# Altium PCB Vesta_cape.PcbDoc (part 1 of 2)
Units mm, origin at the board's own origin, x right, y up, seen from the top; angles counter-clockwise.
Board outline 180 x 109.5 mm, 4 copper layers (Component Side, Ground Plane, Power Plane, Solder Side), stack 1.602 mm thick; 135 components, 158 nets, 582 pads, 796 vias.
Unrouted connection lines stored in the file: 10.
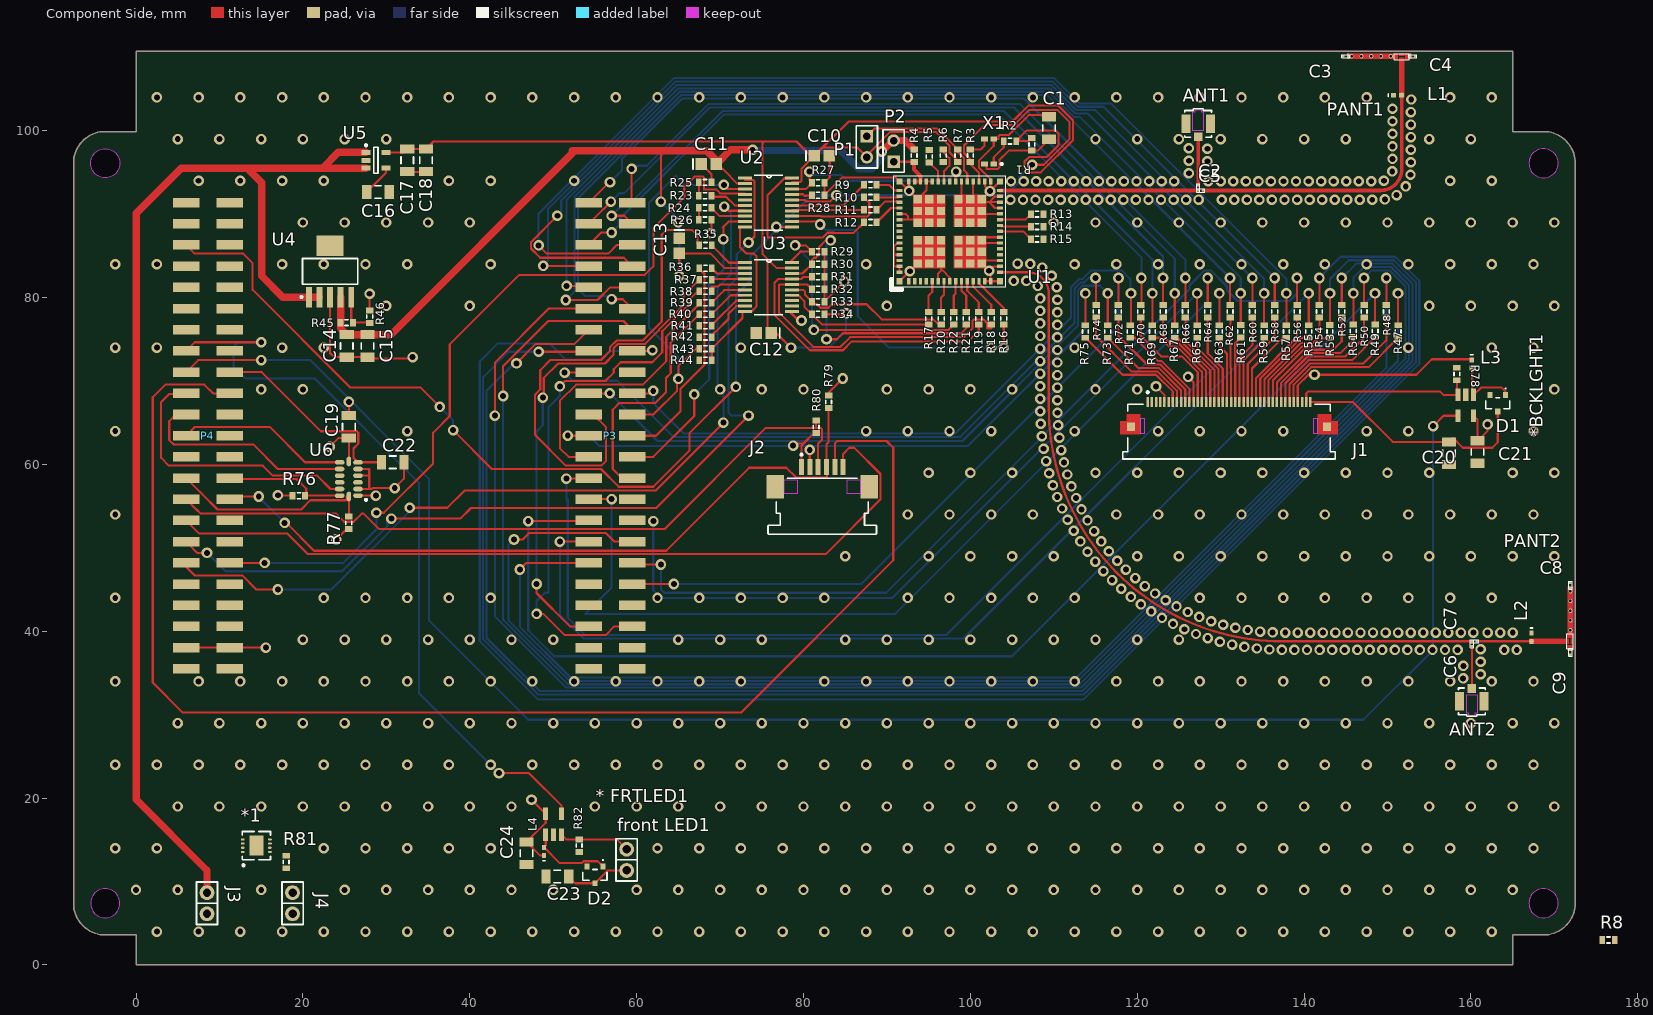
[diagram p0: Component Side view]
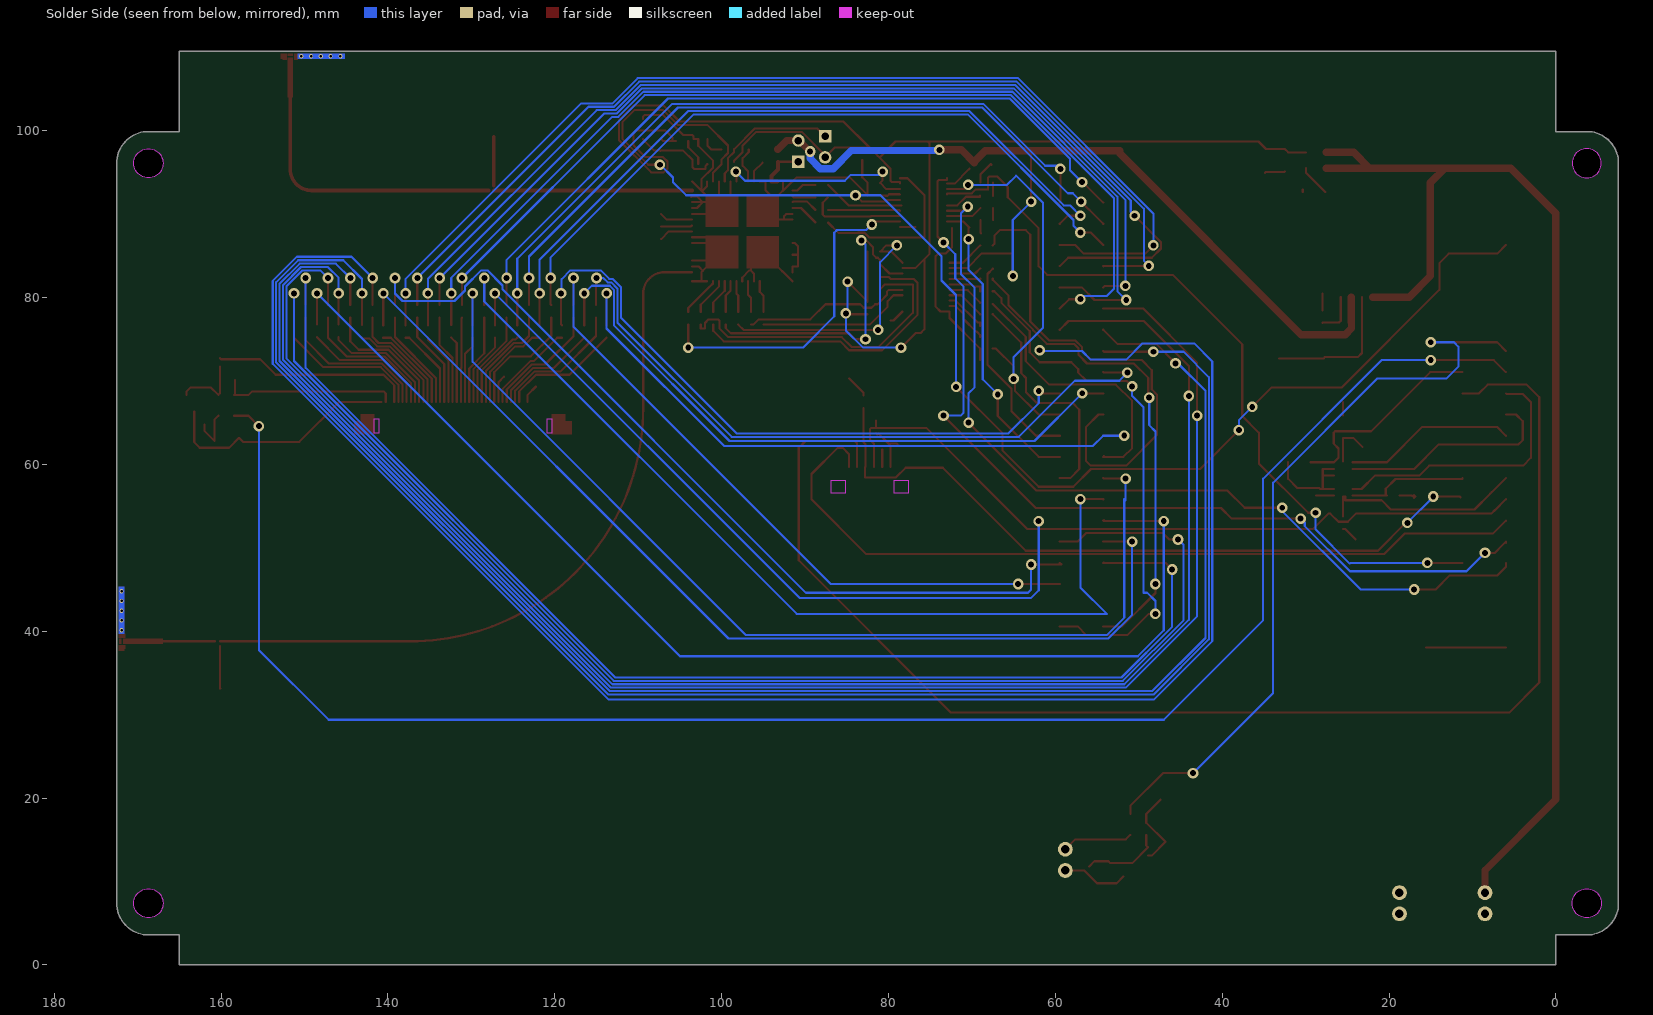
[diagram p1: Solder Side view, seen from below]
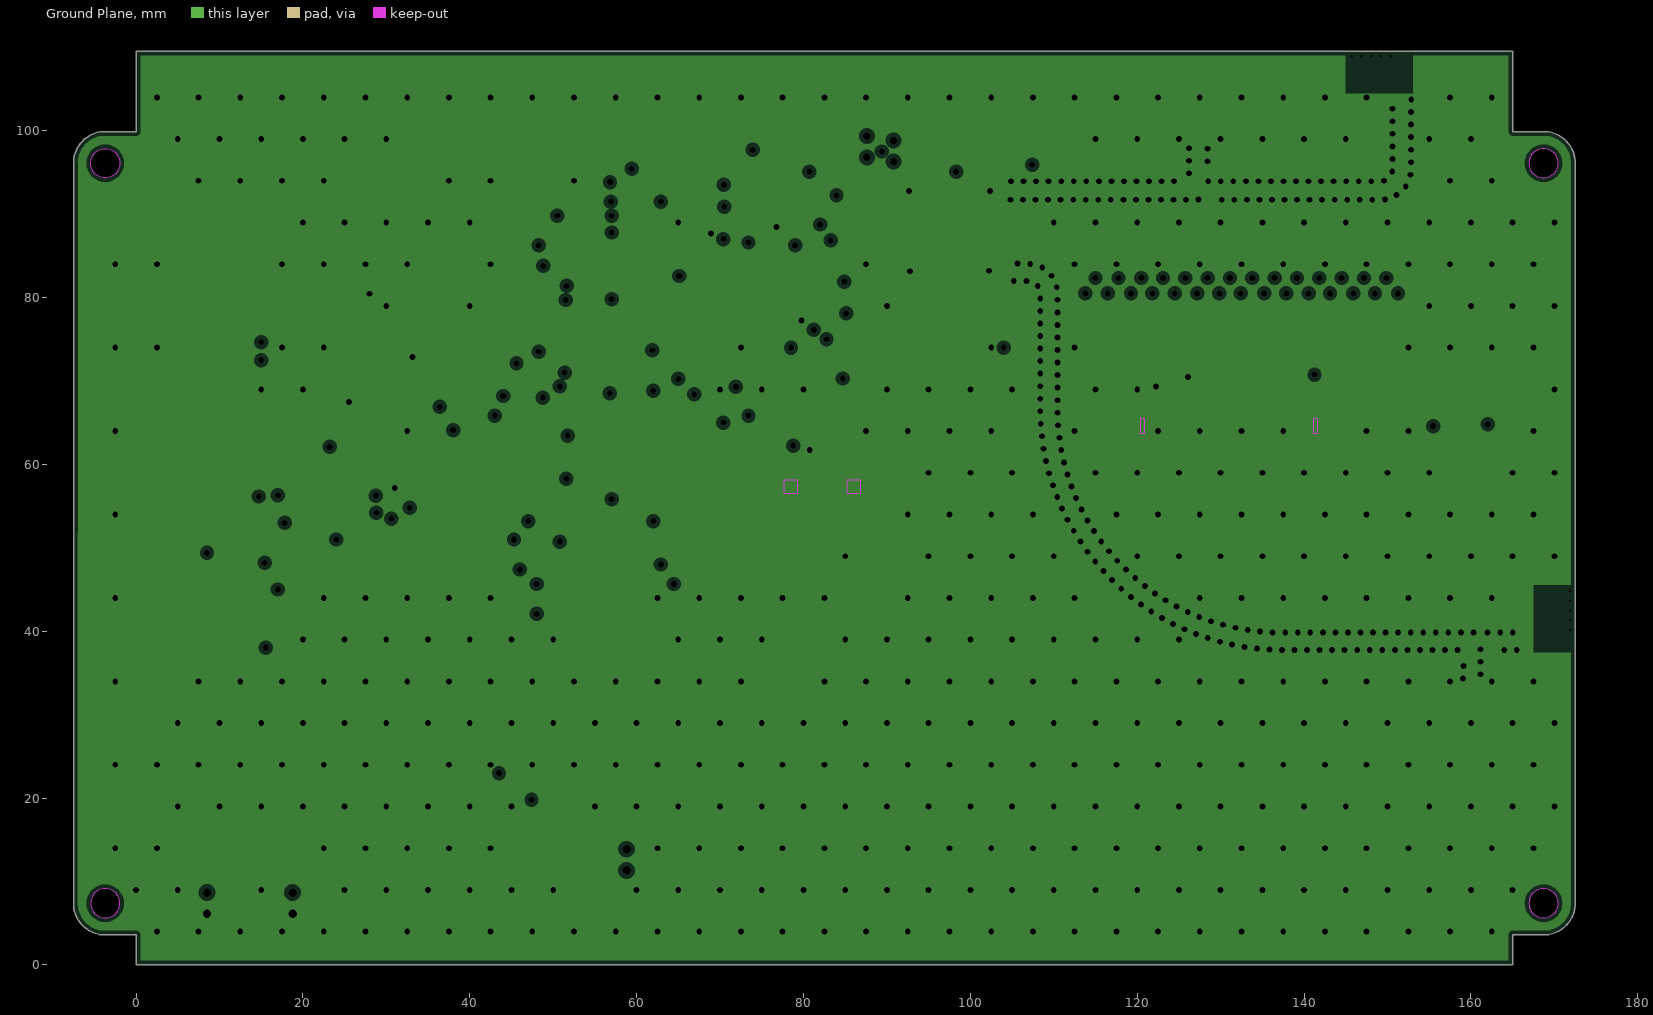
[diagram p2: Ground Plane, clearances drawn from the general rule]
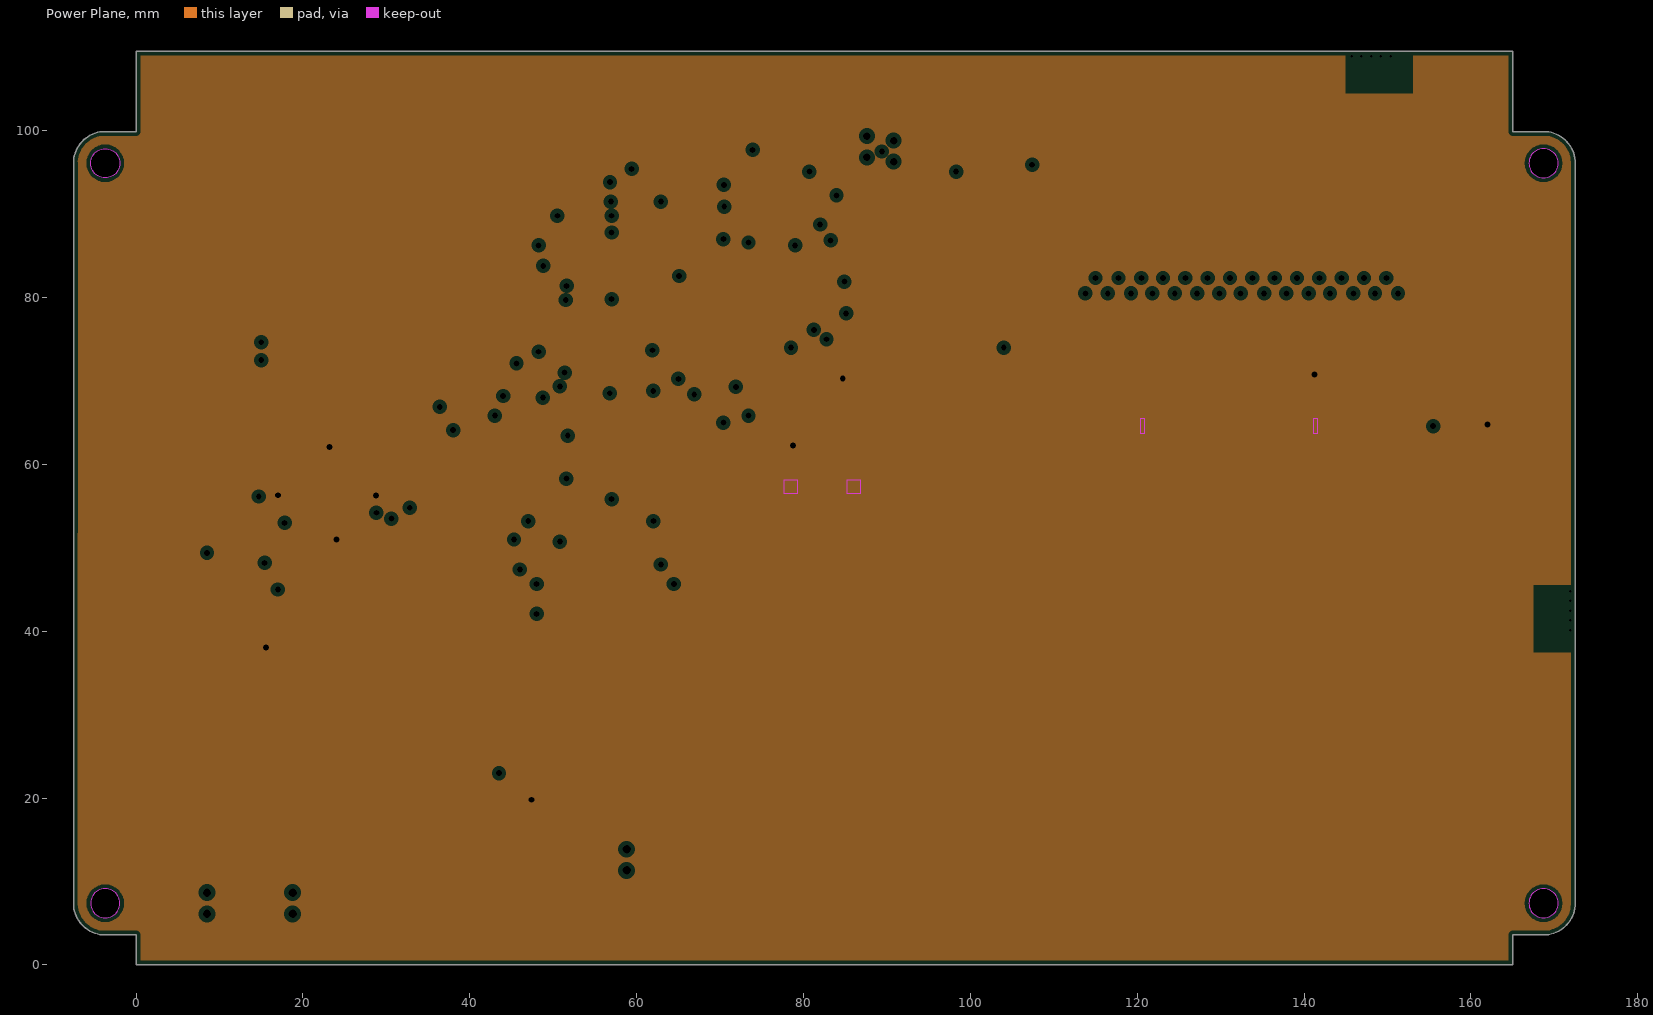
[diagram p3: Power Plane, clearances drawn from the general rule]

## Layer stack, top to bottom
Top Solder: solder mask 0.0102, Solder Resist, Dk 3.5
Component Side: signal copper 0.03
Dielectric 1: core 0.2, FR-4, Dk 4.58
Ground Plane: plane copper 0.018
Dielectric 3: prepreg 1.1, FR-4, Dk 4.58
Power Plane: plane copper 0.018
Dielectric 4: core 0.2, FR-4, Dk 4.58
Solder Side: signal copper 0.0356
Bottom Solder: solder mask 0.0102, Solder Resist, Dk 3.5

## Board outline
-4.314,3.65 0,3.65 0,0 165,0 165,3.65 169.315,3.65 ccw(c168.7,7.4) 172.5,7.4 172.5,96.092 ccw(c168.7,96.1) 169.314,99.85 165,99.85 165,109.5 0,109.5 0,99.85 -4.314,99.85 ccw(c-3.7,96.1) -7.5,96.1 -7.5,7.4 ccw(c-3.7,7.4)
cut-out: 166.95,96.1 ccw(c168.7,96.1) 168.7,94.35 ccw(c168.7,96.1) 170.45,96.1 ccw(c168.7,96.1) 168.7,97.85 ccw(c168.7,96.1)
cut-out: 166.95,7.4 ccw(c168.7,7.4) 168.7,5.65 ccw(c168.7,7.4) 170.45,7.4 ccw(c168.7,7.4) 168.7,9.15 ccw(c168.7,7.4)
cut-out: -5.45,7.4 ccw(c-3.7,7.4) -3.7,5.65 ccw(c-3.7,7.4) -1.95,7.4 ccw(c-3.7,7.4) -3.7,9.15 ccw(c-3.7,7.4)
cut-out: -3.7,94.35 cw(c-3.7,96.1) -5.45,96.1 cw(c-3.7,96.1) -3.7,97.85 cw(c-3.7,96.1) -1.95,96.1 cw(c-3.7,96.1)

## Design rules (kind name [scope] priority, off if disabled: settings)
AssemblyTestPointUsage SilkToBoardRegionClearance [All] p2:
Clearance Clearance_2 [InNamedPolygon('Component Side-No Net')] p1: gap=0.254
Clearance [InNet('NetC5_1')] p2: gap=0.152
Clearance "Clearance for polygon" [(HasFootprint('ANT_BRD_CUT') OR InNet('NetC21_1'))] p3: gap=0
Clearance Clearance_1 [All] p4: gap=0.152
ComponentClearance [InComponent('PANT2') Or InComponent('PANT1')] p1: gap=0 collisioncheckmode=3 verticalgap=0 showdistances=FALSE
ComponentClearance ComponentClearance_1 [InComponent('C5') Or InComponent('C24') Or InComponent('C23') Or InComponent('C17')] p2: gap=0 collisioncheckmode=3 verticalgap=0 showdistances=FALSE
ComponentClearance ComponentClearance_2 [All] p3: gap=0.254 collisioncheckmode=3 verticalgap=0.254 showdistances=FALSE
MatchedLengths [InNetClass(SDIO_wl1835_pads_to_r)] p1: tolerance=5 checknetsindiffpair=TRUE checkdiffpairvsdiffpair=TRUE checkothers=TRUE
MatchedLengths DiffPair_DIFF100MatchedLengths [InDifferentialPairClass('DIFF100')] p2: tolerance=0.152 checknetsindiffpair=TRUE checkdiffpairvsdiffpair=FALSE checkothers=FALSE
MinimumSolderMaskSliver SilkscreenOverComponentPads_1 [All] p2: minsoldermaskwidth=0.254
MinimumSolderMaskSliver SilkToSolderMaskClearance [IsPad] p3: minsoldermaskwidth=0.254
MinimumSolderMaskSliver SilkscreenOverComponentPads [All] p4: minsoldermaskwidth=0.254
PlaneClearance [All] p1: clearance=0.508
PlaneConnect [All] p1: planeconnectstyle=Relief reliefexpansion=0.508 reliefentries=4 reliefconductorwidth=0.254 reliefairgap=0.254
PolygonConnect PolygonConnect_2 [All - IsVia vs IsNamedPolygon('Component Side-No Net')] p1: connectstyle=Relief reliefconductorwidth=0.3 reliefentries=4 polygonreliefangle="90 Angle" airgapwidth=0.3
PolygonConnect "PAD connections rule" [All vs IsNamedPolygon('Component Side-GND')] p2: connectstyle=Relief reliefconductorwidth=0.254 reliefentries=4 polygonreliefangle="90 Angle" airgapwidth=0.254
PolygonConnect PolygonConnect_1 [All vs IsNamedPolygon('Component Side-GND')] p3: connectstyle=Relief reliefconductorwidth=0.254 reliefentries=4 polygonreliefangle="90 Angle" airgapwidth=0.254
PolygonConnect [All] p4: connectstyle=Direct reliefconductorwidth=0.254 reliefentries=4 polygonreliefangle="90 Angle" airgapwidth=0.254
RoutingVias [All] p1: holewidth=0.305 width=0.635 viastyle="Through Hole" minholewidth=0.3 minwidth=0.453 maxholewidth=0.711 maxwidth=1.27
ShortCircuit ShortCircuit_molex [J1 vs J1] p1: allowed=TRUE
SilkToBoardRegionClearance SilkToBoardRegionClearance_1 [All] p1:
SilkToSolderMaskClearance SilkToSolderMaskClearance_1 [IsPad] p1: minsilkscreentomaskgap=0.254 clearancetoexposedcopper=TRUE
SolderMaskExpansion SolderMaskExpansion_via_tenting [IsVia] p1: expansion=-2
SolderMaskExpansion [All] p2: expansion=0.102
Width Width_VDD_Bat [InNet('VDD_BAT (3.7-4.2V)')] p1: maxlimit=0.889 minlimit=0.889 preferedwidth=0.889
Width [InNet('NetC5_1') Or InNet('NetC24_1') Or InNet('NetC17_1') Or InNet('NetANT2_1') Or InNet('NetC23_1') Or InNet('ANTENNA1 NET')] p2: maxlimit=0.27 minlimit=0.263 preferedwidth=0.27 toplayer_minwidth=0.27 bottomlayer_maxwidth=0.263 bottomlayer_prefwidth=0.263 impedancedriven=TRUE minimp=50.000000 maximp=50.000000 favimp=50.000000
Width Width_1 [All] p3: maxlimit=5 minlimit=0.254 preferedwidth=0.254
24 further rules are at their usual default settings.

## Classes and differential pairs
net class LCD_DATA[0..23]: LCD_DATA0 LCD_DATA1 LCD_DATA2 LCD_DATA3 LCD_DATA4 LCD_DATA5 LCD_DATA6 LCD_DATA7 LCD_DATA8 LCD_DATA9 LCD_DATA10 LCD_DATA11 LCD_DATA12 LCD_DATA13 LCD_DATA14 LCD_DATA15 LCD_DATA16 LCD_DATA17 LCD_DATA18 LCD_DATA19 LCD_DATA20 LCD_DATA21 LCD_DATA22 LCD_DATA23
component class Vesta_wifi_power_3v3_1v8: C14 C15 C16 C17 C20 R11 R46 U4 U5
component class vesta_IO_buffering: C10 C11 C13 C14 R3 R6 R23 R25 R29 R30 R32 R33 R35 R36 R37 R39 R40 R42 R43 R44 R70 R72 R73 R74 R76 R80 U2 U3
component class Vesta_cape: *1 "* FRTLED1" *BCKLGHT1 C3 C5 C7 C9 C10 C20 D1 D2 "front LED1" HDR_1 HDR_2 J1 J2 J3 J4 L2 L3 P3 P4 R14 R15 R18 R21 R22 R23 R25 R26 R28 R29 R30 R32 R33 R35 R36 R37 R39 R40 R42 R43 R44 R47 R50 R51 R53 R54 R58 R61 R65 R68 R72 R75 R79 R80 R81 R82 U6
component class Vesta_cape_wifi: ANT1 ANT2 C3 C5 C6 C9 C10 C19 C20 C21 C24 L2 L3 P1 P2 PANT1 PANT2 R2 R3 R6 R9 R10 R11 R13 R14 R15 R16 R17 R18 R21 R32 R47 R50 R51 R53 R54 R58 R65 R68 U1 X1

## Components (designator, comment, footprint, x,y, rotation, side; value= is the part's Value field where it differs from the comment)
*1 "CN3065" CN3065-LIPO 14.418,14.3 r90 top
"* FRTLED1" "FAN5333B-front-LED" FAN5333A 49.1,15.6 r90 top
*BCKLGHT1 "FAN5333B-LCD-backlight" FAN5333A 160.325,68.329 r270 top
ANT1 "U.FL-R-SMT" U.FL-R-SMT 127.304,100.809 r0 top
ANT2 "U.FL-R-SMT" U.FL-R-SMT 160.1,31.6 r180 top
C1 "100nF" C1206 109.433,100.318 r270 top
C2 "10pF" CAPACITOR_0603 127.305,93.131 r90 top
C3 "2.2pF" CAPACITOR_0603 144.993,108.924 r180 top
C4 "2.2pF" CAPACITOR_0603 153.013,108.924 r0 top
C5 "10pF" CAPACITOR_0603 127.605,92.831 r180 top
C6 "10pF" CAPACITOR_0603 160.122,38.5 r270 top
C7 "10pF" CAPACITOR_0603 160.422,38.8 r180 top
C8 "2.2pF" CAPACITOR_0603 171.928,45.51 r90 top
C9 "2.2pF" CAPACITOR_0603 171.928,37.49 r270 top
C10 "Cap Semi" C2512 82.2,97 r0 top
C11 "Cap Semi" C2512 68.65,96 r0 top
C12 "100nF" C2512 75.25,75.75 r180 top
C13 "100nF" C2512 65.1,86.2 r270 top
C14 "10uF" C1206 25.25,74.2 r90 top
C15 "10uF" C1206 27.75,74.2 r90 top
C16 "Cap Semi" C1206 29,92.65 r180 top
C17 "Cap Semi" C1206 32.5,96.45 r90 top
C18 "Cap Semi" C1206 34.75,96.45 r90 top
C19 "0.1uF" C1206 25.5,64.5 r270 top
C20 "1uF" C1206 157.37,61.346 r90 top
C21 "10uF" C1206 160.798,61.478 r90 top
C22 "1uF" C1206 30.75,60.25 r180 top
C23 "1uF" C1206 50.5,10.6 r0 top
C24 "10uF" C1206 46.8,13.4 r90 top
D1 "BAT54" NXP-SOT23-3_V 163.21,67.334 r0 top
D2 "BAT54" NXP-SOT23-3_V 55,10.8 r0 top
"front LED1" "ValueValueAux" JMP1X2-F180_2.54 58.8,12.6 r90 top
J1 "54104-4031" MOLX-54104-4031 131,66 r0 top locked
J2 "52271-0679" MOLX-52271-0679 82.25,58.5 r0 top locked
J3 "ValueValueAux" JMP1X2-F180_2.54 8.5,7.4 r270 top
J4 "ValueValueAux" JMP1X2-F180_2.54 18.75,7.4 r90 top
L1 "1.5nH" 0402-A 151.203,104.249 r0 top
L2 "1.5nH" 0402-A 167.253,39.3 r270 top
L3 "10uH" 0402-A 160.103,72.038 r270 top
L4 "10uH" 0402-A 48.9,13.6 r90 top
P1 "Header 2" HDR1X2 87.6,99.34 r270 top
P2 "Header 2" HDR1X2 90.804,96.281 r90 top
P3 "P8" HEADER_23_2_SMD 54.26,35.5 r90 top locked
P4 "P9" HEADER_23_2_SMD 6,35.5 r90 top locked
PANT1 "ANTENNA" ANT_BRD_CUT 151.703,108.849 r0 top locked
PANT2 "ANTENNA" ANT_BRD_CUT 171.853,38.8 r270 top locked
R1 "0" J1-0603 107.368,98.364 r90 top
R2 "1K0" J1-0603 104.75,98.75 r0 top
R3 "0" J1-0603 100,97 r270 top
R4 "0" J1-0603 93.25,97 r270 top
R5 "0" J1-0603 95.079,96.925 r270 top
R6 "0" J1-0603 96.75,97 r90 top
R7 "0" J1-0603 98.5,97 r90 top
R8 "0" J1-0603 176.494,2.994 r0 top
R9 "0" J1-0603 88,93.5 r0 top
R10 "0" J1-0603 88,92 r0 top
R11 "0" J1-0603 88,90.5 r0 top
R12 "0" J1-0603 88,89 r0 top
R13 "0" J1-0603 108,90 r180 top
R14 "0" J1-0603 108,88.5 r180 top
R15 "0" J1-0603 108,87 r180 top
R16 "0" J1-0603 104,77.5 r270 top
R17 "0" J1-0603 95,77.5 r90 top
R18 "0" J1-0603 102.5,77.5 r270 top
R19 "0" J1-0603 101,77.5 r270 top
R20 "0" J1-0603 96.5,77.5 r90 top
R21 "0" J1-0603 99.5,77.5 r270 top
R22 "0" J1-0603 98,77.5 r270 top
R23 "0" J1-0603 68.2,92.2 r0 top
R24 "0" J1-0603 68.2,90.75 r0 top
R25 "1K0" J1-0603 68.2,93.8 r180 top
R26 "1K0" J1-0603 68.2,89.3 r180 top
R27 "150K" J1-0603 81.75,93.75 r180 top
R28 "150K" J1-0603 81.75,92.25 r180 top
R29 "10k" J1-0603 81.75,85.5 r0 top
R30 "10k" J1-0603 81.75,84 r0 top
R31 "10k" J1-0603 81.75,82.5 r0 top
R32 "10k" J1-0603 81.75,81 r0 top
R33 "10k" J1-0603 81.75,79.5 r0 top
R34 "10k" J1-0603 81.75,78 r0 top
R35 "0" J1-0603 68.25,86.25 r0 top
R36 "0" J1-0603 68.25,83.5 r0 top
R37 "0" J1-0603 68.25,82.125 r0 top
R38 "0" J1-0603 68.25,80.75 r0 top
R39 "0" J1-0603 68.25,79.375 r0 top
R40 "0" J1-0603 68.25,78 r0 top
R41 "0" J1-0603 68.25,76.625 r0 top
R42 "0" J1-0603 68.25,75.25 r0 top
R43 "0" J1-0603 68.25,73.875 r0 top
R44 "1K0" J1-0603 68.25,72.5 r0 top
R45 "7.15K" J1-0603 25.25,77 r180 top
R46 "4.12K" J1-0603 28,77.7 r270 top
R47 "0" J1-0603 151.257,75.934 r270 top
R48 "0" J1-0603 149.86,78.347 r270 top
R49 "0" J1-0603 148.5,76 r270 top
R50 "0" J1-0603 147.183,78.347 r270 top
R51 "0" J1-0603 145.9,76 r270 top
R52 "0" J1-0603 144.506,78.347 r270 top
R53 "0" J1-0603 143.1,75.95 r270 top
R54 "0" J1-0603 141.83,78.347 r270 top
R55 "0" J1-0603 140.553,75.934 r270 top
R56 "0" J1-0603 139.153,78.347 r270 top
R57 "0" J1-0603 137.877,75.934 r270 top
R58 "0" J1-0603 136.476,78.347 r270 top
R59 "0" J1-0603 135.201,75.934 r270 top
R60 "0" J1-0603 133.799,78.347 r270 top
R61 "0" J1-0603 132.4,75.95 r270 top
R62 "0" J1-0603 131.123,78.347 r270 top
R63 "0" J1-0603 129.848,75.934 r270 top
R64 "0" J1-0603 128.446,78.347 r270 top
R65 "0" J1-0603 127.172,75.934 r270 top
R66 "0" J1-0603 125.769,78.347 r270 top
R67 "0" J1-0603 124.496,75.934 r270 top
R68 "0" J1-0603 123.092,78.347 r270 top
R69 "0" J1-0603 121.82,75.934 r270 top
R70 "0" J1-0603 120.416,78.347 r270 top
R71 "0" J1-0603 119.144,75.934 r270 top
R72 "0" J1-0603 117.739,78.347 r270 top
R73 "0" J1-0603 116.468,75.934 r270 top
R74 "0" J1-0603 115.062,78.347 r270 top
R75 "0" J1-0603 113.792,75.934 r270 top
R76 "4.7k" J1-0603 19.5,56.25 r180 top
R77 "4.7k" J1-0603 25.5,53 r270 top
R78 "6" J1-0603 158.325,70.833 r270 top
R79 "4.7k" J1-0603 83,67.5 r90 top
R80 "4.7k" J1-0603 81.5,64.5 r270 top
R81 "2.2k" J1-0603 17.981,12.35 r270 top
R82 "100" J1-0603 53.1,14.3 r90 top
U1 "WG7835-T0B module_ref_130904" E-13.4X13.3-N100_0.75-TOP 90.829,81.281 r0 top
U2 "TXS0108E_PW_20" PW20 75.819,91.375 r0 top
U3 "TXS0108E_PW_20" PW20 75.819,81.25 r0 top
U4 "TL1963ADCQT" TI-DCQ6_M 23.25,83.125 r90 top
U5 "TPS73618DBVR" TI-DBV5_N 28.75,96.45 r0 top
U6 "ADXL345BCCZ-RL7" ADI-CC-14-1_V 25.5,58.25 r180 top
X1 "ASH7K-32.768KHz-T" ABRA-ASH7K-4_V 102.25,97.5 r90 top

## Footprints (in the part's own frame and the unit in brackets; to place one, negate y for a bottom-side part, rotate by r counter-clockwise, add the part's x,y. Pads: shape width x height; smd on the part's side, far side on the other; paste and mask are expansions set on the pad)
0402-A [mm] "Chip Inductor, Body 1.0x0.5mm, IPC High Density"
  rect 0.6x0.5 smd: 1(-0.5,0) 2(0.5,0)
  silkscreen extent -1.1,-0.15 -1.1,0.15, body extent -0.55,-0.3 0.55,0.3, height 0.55
ABRA-ASH7K-4_V [mm] "Hand Drawn, 4-Leads, Body 3.2x1.5mm"
  rect 0.6x0.8 smd: 1(-1.5,-0.55) 2(1.5,-0.55) 3(1.5,0.55) 4(-1.5,0.55)
  silkscreen extent -1.62,-1.63 -1.38,-1.38, body extent -1.6,-0.75 1.6,0.75, height 1
ADI-CC-14-1_V [mm] "QFN, 14-Leads, Body 5x3mm, Pitch 0.8mm"
  oval 1.145x0.55 smd: 1(-1.098,2) 2(-1.098,1.2) 3(-1.098,0.4) 4(-1.098,-0.4) 5(-1.098,-1.2) 6(-1.098,-2) 8(1.097,-2) 9(1.097,-1.2) 10(1.097,-0.4) 11(1.097,0.4) 12(1.097,1.2) 13(1.097,2)
  oval 0.55x1.145 smd: 7(0,-2.097) 14(0,2.098)
  silkscreen extent -2.18,2.38 -1.93,2.62, body extent -1.5,-2.5 1.5,2.5, height 1
ANT_BRD_CUT [mm]
  rect 0.2x0.6 smd: 1(-6.41,0.075) 2(1.01,0.075) 3(0,-4.6)
  Component Side pour cut-out: -6.7,0.65 1.3,0.65 1.3,-4.35 -6.7,-4.35
  Component Side region: -6.56,0.4 -6.56,-0.25 -0.9,-0.25 -0.9,-0.364 -0.45,-0.364 -0.45,0.4
  Component Side region: -0.3,0.364 0.3,0.364 0.3,0.105 -0.3,0.105
  Component Side region: 0.45,-0.364 0.9,-0.364 0.9,-0.25 1.16,-0.25 1.16,0.4 0.45,0.4
  Component Side region: -0.3,-0.105 0.3,-0.105 0.3,-0.791 0.3,-4.85 -0.3,-4.85
  Solder Side region: -6.56,0.4 -0.9,0.4 -0.9,-0.25 -6.56,-0.25
  Ground Plane pour cut-out: -6.7,0.65 -6.7,-4.35 1.3,-4.35 1.3,0.65
  Power Plane pour cut-out: -6.7,0.65 1.3,0.65 1.3,-4.35 -6.7,-4.35
  silkscreen extent -0.9,-0.36 0.9,0.4
C1206 [mm] "Chip Capacitor, Body 3.2x1.6mm, IPC High Density"
  rect 1.1x1.7 smd: 1(-1.35,0) 2(1.35,0)
  silkscreen extent -0.4,-0.75 0.4,0.75, body extent -1.7,-0.9 1.7,0.9, height 1.3
C2512 [mm] "Chip Capacitor, Body 2.54x1.27mm, IPC High Density"
  rect 1.4x1.4 smd: 1(-0.9,0) 2(0.9,0)
  silkscreen extent -1.9,-0.6 -1.9,0.6, body extent -1.45,-0.82 1.45,0.82, height 1.3
CAPACITOR_0603 [mm]
  rect 0.3x0.3 smd: 1(-0.3,0) 2(0.3,0)
  silkscreen extent -0.5,-0.2 0.5,0.2
CN3065-LIPO [mm] "QFN, 8-Leads, Body 3,00x3,00mm, Pitch 0,50mm, Thermal Pad 2,40x1,70mm, IPC Medium Density"
  oval 0.25x0.45 smd: 1(-0.75,-1.625) 2(-0.25,-1.625) 3(0.25,-1.625) 4(0.75,-1.625) 5(0.75,1.625) 6(0.25,1.625) 7(-0.25,1.625) 8(-0.75,1.625)
  rect 2.4x1.7 smd: 9(0,0)
  silkscreen extent -2.47,-1.7 1.7,1.7, body extent -1.55,-1.55 1.55,1.55, height 0.9
E-13.4X13.3-N100_0.75-TOP [mm]
  rect 0.75x0.75 smd mask+0.03: 1(0.675,0.675) 17(12.725,0.675) 33(12.725,12.625) 49(0.675,12.625)
  rect 0.4x0.75 smd mask+0.03: 2(1.8,0.675) 3(2.5,0.675) 4(3.2,0.675) 5(3.9,0.675) 6(4.6,0.675) 7(5.3,0.675) 8(6,0.675) 9(6.7,0.675) 10(7.4,0.675) 11(8.1,0.675) 12(8.8,0.675) 13(9.5,0.675) 14(10.2,0.675) 15(10.9,0.675) 16(11.6,0.675) 34(11.6,12.625) 35(10.9,12.625) 36(10.2,12.625) 37(9.5,12.625) 38(8.8,12.625) 39(8.1,12.625) 40(7.4,12.625) 41(6.7,12.625) 42(6,12.625) 43(5.3,12.625) 44(4.6,12.625) 45(3.9,12.625) 46(3.2,12.625) 47(2.5,12.625) 48(1.8,12.625)
  rect 0.75x0.4 smd mask+0.03: 18(12.725,1.75) 19(12.725,2.45) 20(12.725,3.15) 21(12.725,3.85) 22(12.725,4.55) 23(12.725,5.25) 24(12.725,5.95) 25(12.725,6.65) 26(12.725,7.35) 27(12.725,8.05) 28(12.725,8.75) 29(12.725,9.45) 30(12.725,10.15) 31(12.725,10.85) 32(12.725,11.55) 50(0.675,11.55) 51(0.675,10.85) 52(0.675,10.15) 53(0.675,9.45) 54(0.675,8.75) 55(0.675,8.05) 56(0.675,7.35) 57(0.675,6.65) 58(0.675,5.95) 59(0.675,5.25) 60(0.675,4.55) 61(0.675,3.85) 62(0.675,3.15) 63(0.675,2.45) 64(0.675,1.75)
  rect 1x1 smd mask+0.03: G1(2.85,2.8) G2(4.25,2.8) G3(5.65,2.8) G4(2.85,4.2) G5(4.25,4.2) G6(5.65,4.2) G7(2.85,5.6) G8(4.25,5.6) G9(5.65,5.6) G10(7.75,2.8) G11(9.15,2.8) G12(10.55,2.8) G13(7.75,4.2) G14(9.15,4.2) G15(10.55,4.2) G16(7.75,5.6) G17(9.15,5.6) G18(10.55,5.6) G19(2.85,7.7) G20(4.25,7.7) G21(5.65,7.7) G22(2.85,9.1) G23(4.25,9.1) G24(5.65,9.1) G25(2.85,10.5) G26(4.25,10.5) G27(5.65,10.5) G28(7.75,7.7) G29(9.15,7.7) G30(10.55,7.7) G31(7.75,9.1) G32(9.15,9.1) G33(10.55,9.1) G34(7.75,10.5) G35(9.15,10.5) G36(10.55,10.5)
  silkscreen extent -0.4,-0.4 13.4,13.3
FAN5333A [mm]
  rect 1.5x0.6 smd: 1(0,0) 2(0,-0.95) 3(0,-1.9) 4(2.5,-1.9) 5(2.5,0)
HDR1X2 [mm] "Connector; Header; 2 Position"
  rect 1.5x1.5 hole 0.9: 1(0,0)
  round 1.5 hole 0.9: 2(2.54,0)
  silkscreen extent -1.27,-1.27 3.81,1.27
HEADER_23_2_SMD [mm]
  rect 1.14x3.175 smd: 1(0,0) 2(0,-5.205) 3(2.54,0) 4(2.54,-5.205) 5(5.08,0) 6(5.08,-5.205) 7(7.62,0) 8(7.62,-5.205) 9(10.16,0) 10(10.16,-5.205) 11(12.7,0) 12(12.7,-5.205) 13(15.24,0) 14(15.24,-5.205) 15(17.78,0) 16(17.78,-5.205) 17(20.32,0) 18(20.32,-5.205) 19(22.86,0) 20(22.86,-5.205) 21(25.4,0) 22(25.4,-5.205) 22(25.4,-5.205) 23(27.94,0) 23(27.94,0) 24(27.94,-5.205) 25(30.48,0) 26(30.48,-5.205) 27(33.02,0) 28(33.02,-5.205) 29(35.56,0) 30(35.56,-5.205) 31(38.1,0) 32(38.1,-5.205) 33(40.64,0) 34(40.64,-5.205) 35(43.18,0) 36(43.18,-5.205) 37(45.72,0) 38(45.72,-5.205) 39(48.26,0) 40(48.26,-5.205) 41(50.8,0) 42(50.8,-5.205) 43(53.34,0) 44(53.34,-5.205) 45(55.88,0) 46(55.88,-5.205)
  body extent -1.1,-6.29 57.13,1.08, height 14.47
J1-0603 [mm] "Chip Resistor, Body 1.6x0.8mm, IPC High Density"
  rect 0.7x0.9 smd: 1(-0.75,0) 2(0.75,0)
  silkscreen extent -0.2,-0.35 0.2,0.35, body extent -0.85,-0.48 0.85,0.48, height 0.9
JMP1X2-F180_2.54 [mil]
  round 70 hole 40: 1(-50,0) 2(50,0)
  silkscreen extent -100,-50 100,50, body extent -104,-54 104,54, height 169
MOLX-52271-0679 [mm] "FPC Connector, 6-Leads, Right Angle, Pitch 1.0 mm, Mated Height 3.0 mm, SMT"
  rect 0.6x1.9 smd: 1(-2.5,1.175) 2(-1.5,1.175) 3(-0.5,1.175) 4(0.5,1.175) 5(1.5,1.175) 6(2.5,1.175)
  rect 2.1x2.8 smd: MP1(-5.65,-1.175) MP2(5.65,-1.175)
  Keep-Out Layer region: -4.6,-1.975 -2.95,-1.975 -2.95,-0.375 -4.6,-0.375
  Keep-Out Layer region: 2.95,-1.975 4.6,-1.975 4.6,-0.375 2.95,-0.375
  silkscreen extent -6.5,-6.87 6.5,2.8, body extent -6.5,-6.87 6.5,1.83, height 3.01
MOLX-54104-4031 [mm] "FPC Connector, 40-Leads, Right Angle, Pitch 0.5 mm, Mated Height 2.0 mm, SMT"
  rect 0.3x1.2 smd: 1(-9.75,1.5) 2(-9.25,1.5) 3(-8.75,1.5) 4(-8.25,1.5) 5(-7.75,1.5) 6(-7.25,1.5) 7(-6.75,1.5) 8(-6.25,1.5) 9(-5.75,1.5) 10(-5.25,1.5) 11(-4.75,1.5) 12(-4.25,1.5) 13(-3.75,1.5) 14(-3.25,1.5) 15(-2.75,1.5) 16(-2.25,1.5) 17(-1.75,1.5) 18(-1.25,1.5) 19(-0.75,1.5) 20(-0.25,1.5) 21(0.25,1.5) 22(0.75,1.5) 23(1.25,1.5) 24(1.75,1.5) 25(2.25,1.5) 26(2.75,1.5) 27(3.25,1.5) 28(3.75,1.5) 29(4.25,1.5) 30(4.75,1.5) 31(5.25,1.5) 32(5.75,1.5) 33(6.25,1.5) 34(6.75,1.5) 35(7.25,1.5) 36(7.75,1.5) 37(8.25,1.5) 38(8.75,1.5) 39(9.25,1.5) 40(9.75,1.5)
  rect 1x1 smd: MP1(-11.75,-1.5) MP2(11.75,-1.5)
  Component Side region: -10.65,0 -12.25,0 -12.25,-0.8 -13.05,-0.8 -13.05,-2.4 -10.65,-2.4
  Component Side region: 10.65,0 12.25,0 12.25,-0.8 13.05,-0.8 13.05,-2.4 10.65,-2.4
  Keep-Out Layer region: -10.1,-0.55 -10.65,-0.55 -10.65,-2.25 -10.1,-2.25
  Keep-Out Layer region: 10.65,-0.55 10.1,-0.55 10.1,-2.25 10.65,-2.25
  silkscreen extent -12.75,-5.35 12.75,2.77, body extent -12.75,-5.35 12.75,1.8, height 2.06
NXP-SOT23-3_V [mm] "SOT23, 3-Leads, Body 1.3x2.9mm, Pitch 0.95mm"
  rect 0.6x0.7 smd paste-0.05: 1(0.95,1) 2(-0.95,1) 3(0,-1)
  silkscreen extent -1.45,-0.65 1.45,1.79, body extent -1.45,-0.65 1.45,0.65, height 1.1
PW20 [mil]
  rect 66x14 smd: 1(-111,115.16) 2(-111,89.57) 3(-111,63.98) 4(-111,38.39) 5(-111,12.8) 6(-111,-12.8) 7(-111,-38.39) 8(-111,-63.98) 9(-111,-89.57) 10(-111,-115.16) 11(111,-115.16) 12(111,-89.57) 13(111,-63.98) 14(111,-38.39) 15(111,-12.8) 16(111,12.8) 17(111,38.39) 18(111,63.98) 19(111,89.57) 20(111,115.16)
  Component Side region: 30,155 30,155 30,155 30,155
  silkscreen extent -68,-130 68,130, body extent -88,-130 88,130, height 51
TI-DBV5_N [mm] "SOT23, 5-Leads, Body 2.9x1.6mm, Pitch 0.95mm, IPC Medium Density"
  rect 1.1x0.6 smd: 1(-1.2,0.95) 2(-1.2,0) 3(-1.2,-0.95) 4(1.2,-0.95) 5(1.2,0.95)
  silkscreen extent -1.32,-1.55 0.25,1.92, body extent -0.87,-1.52 0.87,1.53, height 1.45
TI-DCQ6_M [mm] "SOT223, 6-Leads, Body 6.5x3.5mm, Pitch 1.27mm, IPC Low Density"
  rect 2.45x0.7 smd: 1(-3.075,2.54) 2(-3.075,1.27) 3(-3.075,0) 4(-3.075,-1.27) 5(-3.075,-2.54)
  rect 2.45x3.2 smd: 6(3.075,0)
  silkscreen extent -3.2,-3.3 1.55,3.56, body extent -1.78,-3.27 1.78,3.27, height 1.8
U.FL-R-SMT [mm]
  rect 1x1.05 smd: 1(0,-1.525)
  rect 1.05x2.2 smd: 2(-1.475,0) 2(1.475,0)
  Component Side keep-out region: -0.686,-0.737 0.686,-0.737 0.686,1.397 0.406,1.397 0.406,1.651 -0.406,1.651 -0.406,1.397 -0.686,1.397
  silkscreen extent -1.6,-1.6 1.6,1.8, body extent -1.5,-1.55 1.5,1.55, height 1.25

## Part data
"* FRTLED1" *BCKLGHT1: library part FAN5333B
C1 C2 C3 C4 C5 C6 C7 C8 C9 C12 C13 C14 C15 C19 C20 C21 C22 C23 C24: library part "Cap Semi", "Capacitor (Semiconductor SIM Model)"
C10 C11 C16 C17 C18: "Capacitor (Semiconductor SIM Model)"
D1 D2: library part CMP-0417-00004-1, "Schottky Barrier Diode, 30 V, 2 uA, -55 to 150 degC, 3-Pin SOT23, RoHS, Tape and Reel"
"front LED1": library part JST-2, "=Description"
J1: library part MOLX-54104-4031, "0.5 mm Pitch Easy-On(TM) Type FPC Connector, 2.0 mm Mated Height, Right Angle, ZIF, SMT, Top Contact, 40 Circuits, -20 to 85 degC, ELV and RoHS Compliant, Tape and Reel"
J2: library part MOLX-52271-0679, "1.0 mm Pitch Easy-On(TM) Type FPC Connector, 3.0 mm Mated Height, Right Angle, ZIF, SMT, Bottom Contact, 6 Circuits, -40 to 85 degC, ELV and RoHS Compliant, Tape and Reel"
J3: library part JST-2, "jst2mm connector"
J4: library part JST-2, "jst 2mm connector"
L1 L2 L3 L4: library part Inductor, "Inductor"
P1 P2: "Header, 2-Pin"
P3: library part HDR_2_23_M_P8, "BBB-P8"
P4: library part HDR2-23-M-P9, "BBB-P9"
R1 R2 R3 R4 R5 R6 R7 R8 R9 R10 R11 R12 R13 R14 R15 R16 R17 R18 R19 R20 R21 R22 R23 R24 R25 R26 R27 R28 R29 R30 R31 R32 R33 R34 R35 R36 R37 R38 R39 R40 R41 R42 R43 R44 R45 R46 R47 R48 R49 R50 R51 R52 R53 R54 R55 R56 R57 R58 R59 R60 R61 R62 R63 R64 R65 R66 R67 R68 R69 R70 R71 R72 R73 R74 R75 R76 R77 R78 R79 R80 R81 R82: library part Res3, "Resistor"
U2 U3: "Imported"
U4: library part CMP-0395-00365-1, "Single Output Fast Transient Response LDO, 1.5 A, Adjustable 1.21 to 20 V Output, 2.1 to 20 V Input, 6-pin SOT-223 (DCQ), -40 to 125 degC, Green (RoHS & no Sb/Br)"
U5: library part CMP-0395-00289-1, "Single Output Low Noise LDO, 400 mA, Fixed 1.8 V Output, 1.7 to 5.5 V Input, with Reverse Current Protection, 5-pin SOT-23 (DBV), -40 to 85 degC, Green (RoHS & no Sb/Br)"
U6: library part CMP-0885-00033-1, "3-Axis, +/-2 g / +/-4 g / +/-8 g / +/-16 g Digital Accelerometer with Digital Output, 1.6 KHz BW, Industrial, 14-pin LGA, Reel"
X1: library part CMP-0448-00001-2, "Crystal Oscillator, 32.768 kHz, -40 to 80 degC, 3.2 x 1.5 x 1.0 mm SMD, Tape and Reel"

## Via types
v1: diameter 1.25, hole 0.7, Component Side to Ground Plane, 660 vias
v2: diameter 1.27, hole 0.711, Component Side to Solder Side, 101 vias
v3: diameter 1.27, hole 0.711, Component Side to Ground Plane, 14 vias
v4: diameter 1.27, hole 0.711, Component Side to Power Plane, 10 vias
v5: diameter 0.5, hole 0.3, Component Side to Solder Side, 10 vias
v6: diameter 1.27, hole 0.711, Component Side to Solder Side, tented bottom, 1 vias

## Nets (pads, with @x,y where several pads share a name; then routed paths per layer and width w, separated by ;. In a path a pad name is that pad's centre, name@x,y a point inside that pad or via, vN(x,y) a via of type N, cw(c..) or ccw(c..) an arc to the next point about the centre after c; other vN are vias at no path point)
ACC_ADDRESS: P4.27 U6.12 | length 33.1
  Component Side w0.254: P4.27@6,68.52 5.928,68.448 4,68.448 3.052,67.5 3,67.5 3,60.793 3.935,59.859 15.191,59.859 16.4,58.65 21.7,58.65 23.3,57.05 U6.12@24.403,57.05
ACC_INT1: P4.23 U6.8 | length 20.6
  Component Side w0.254: P4.23@6,63.44 7.06,64.5 16.007,64.5 20.25,60.257 20.25,60.25 U6.8@24.403,60.25
ACC_INT2: P4.25 U6.9 | length 26.5
  Component Side w0.254: P4.25@6,65.98 4.78,65.98 3.98,65.18 3.98,62.907 4.489,62.399 14.051,62.399 17,59.45 U6.9@24.403,59.45
ACC_VS: C22.2 P4.30 U6.6 | length 25.3
  Component Side w0.254: P4.30@11.205,71.06 15.064,71.06 22.145,63.979 26.466,63.979 26.629,63.816 26.629,62.484 26.054,61.909 26.054,60.793 U6.6@26.598,60.25 C22.2@29.4,60.25
"ANTENNA1 NET": ANT1.1 C2.2 | length 5.9
  Component Side w0.429: C2.2@127.304,93.431 ANT1.1@127.304,99.284
BT_EN: P3.9 R8.1 R28.2 U2.17 | length 2.5
  Component Side w0.254: U2.17@78.639,92.35 78.664,92.375 79.925,92.375 80.1,92.2 80.375,92.2 80.425,92.25 R28.2@81,92.25
BT_HCI_CTS: R10.1 U2.13 | length 11.7
  Component Side w0.254: U2.13@78.639,89.75 82.1,89.75 82.121,89.729 87.675,89.729 87.879,89.934 87.879,91.371 R10.1@87.25,92
BT_HCI_RTS: R9.1 U2.15 | length 9.8
  Component Side w0.254: U2.15@78.443,91.05 U2.15@78.639,91.05 84.8,91.05 R9.1@87.25,93.5
BT_HCI_RX: R12.1 U2.20 | length 21.2
  Component Side w0.254: U2.20@78.639,94.3 77.714,94.3 75.7,92.286 75.7,87.2 82.303,87.2 82.871,87.768 83.629,87.768 83.647,87.75 86,87.75 R12.1@87.25,89
BT_HCI_TX: R11.1 U2.14 | length 8.7
  Component Side w0.254: U2.14@78.639,90.4 78.739,90.5 R11.1@87.25,90.5
CLKOUT2: U2.5
EHRPWMOA: *BCKLGHT1.4 P4.29 | length 211.6
  Component Side w0.254: P4.29@6,71.06 7.44,72.5 v2(15,72.5) ; v6(155.459,64.576) 156.711,65.829 *BCKLGHT1.4@158.425,65.829
  Solder Side w0.254: v2(15,72.5) 20.9,72.5 35.1,58.3 35.1,41.3 47.006,29.394 147.094,29.394 155.459,37.759 v6(155.459,64.576)
EHRPWMOB: "* FRTLED1.4" P4.31 | length 92.2
  Component Side w0.254: P4.31@6,73.6 7.041,74.641 v2(15,74.641) ; v2(43.5,23) 47.1,23 51,19.1 51,18.1
  Solder Side w0.254: v2(15,74.641) 12.213,74.641 11.686,74.114 11.686,71.723 13.1,70.308 21.392,70.308 33.9,57.8 33.9,32.6 v2(43.5,23)
GND: "* FRTLED1.2" *1.1 *1.3 *BCKLGHT1.2 ANT1.2 ANT2.2 C1.1 C3.2 C4.2 C8.2 C9.2 C10.2 C11.1 C12.2 C13.1 C14.1 C15.1 C16.1 C17.1 C18.1 C19.1 C20.1 C21.1 C22.1 C23.1 C24.1 J1.5 J1.12 J1.38 J2.2 J3.2 J4.1 L1.1 L2.1 P3.1 P3.2 P4.1 P4.2 R25.1 R26.1 R27.1 R28.1 R44.1 R46.1 R78.1 R81.1 R82.1 U1.1 U1.7 U1.9 U1.15 U1.16 U1.17 U1.19 U1.20 U1.23 U1.24 U1.28 U1.29 U1.30 U1.31 U1.33 U1.34 U1.35 U1.37 U1.39 U1.44 U1.45 U1.48 U1.49 U1.54 U1.55 U1.59 U1.61 U1.63 U1.64 U1.G1 U1.G2 U1.G3 U1.G4 U1.G5 U1.G6 U1.G7 U1.G8 U1.G9 U1.G10 U1.G11 U1.G12 U1.G13 U1.G14 U1.G15 U1.G16 U1.G17 U1.G18 U1.G19 U1.G20 U1.G21 U1.G22 U1.G23 U1.G24 U1.G25 U1.G26 U1.G27 U1.G28 U1.G29 U1.G30 U1.G31 U1.G32 U1.G33 U1.G34 U1.G35 U1.G36 U2.11 U3.11 U4.3 U4.6 U5.2 U6.2 U6.4 U6.5 X1.2 | length 180.9
  Component Side w0.254: U4.3@23.25,80.05 23.25,73.35 23.75,72.85 C14.1@25.25,72.85 C15.1@27.75,72.85 ; C19.1@25.5,65.85 v3(25.5,67.5) ; U6.2@26.598,57.05 28,57.05 ; U6.4@26.598,58.65 27.85,58.65 27.95,58.75 ; U6.5@26.598,59.45 27.95,59.45 27.95,58.75 ; C15.1@27.8,72.7 v3@33.2,72.7 ; R46.1@28,78.45 v3(28,80.45) ; C16.1@30.35,92.65 C16.1@30.35,92.95 ; C22.1@32.1,60.25 32.1,58.264 v3(31,57.164) 28.371,57.164 28.257,57.05 28,57.05 ; C17.1@32.5,95.1 32.55,95.05 34.75,95.05 C18.1@34.85,94.95 ; C11.1@67.65,95.9 C11.1@67.75,96 68.95,94.8 R25.1@68.95,93.8 ; v3(68.9,87.7) 68.95,87.75 R26.1@68.95,89.3 ; v3(76.75,88.45) U2.11@78.639,88.45 ; U3.11@78.319,78.325 79.397,77.247 v3(79.757,77.247) ; J2.2@80.75,59.675 v3(80.75,61.75) ; C10.2@83.15,96.5 83.15,94.4 R27.1@82.5,93.75 R28.1@82.5,92.25 84.65,94.4 91.01,94.4 U1.49@91.504,93.906 91.554,93.906 v3@92.629,92.831 ; U1.1@91.504,81.956 92.7,83.152 v3(92.75,83.152) U1.G1@93.679,84.081 U1.G4@93.679,85.481 U1.G7@93.679,86.881 U1.G8@95.079,86.881 U1.G9@96.479,86.881 U1.G6@96.479,85.481 U1.G3@96.479,84.081 ; U1.64@91.504,83.031 U1.63@91.504,83.731 90.85,83.731 90.85,85.1 ; U1.61@91.504,85.131 90.881,85.131 90.85,85.1 ; U1.59@91.504,86.531 91.234,86.531 90.85,86.147 90.85,85.1 ; U1.55@91.504,89.331 92.5,89.331 ; U1.54@91.504,90.031 92.219,90.031 92.5,89.75 92.5,89.331 ; U1.48@92.629,93.906 v3@92.629,92.831 ; U1.G5@95.079,85.481 U1.G2@95.079,84.081 U1.G3@96.479,84.081 ; U1.G23@95.079,90.381 U1.G26@95.079,91.781 U1.G27@96.479,91.781 U1.G24@96.479,90.381 U1.G21@96.479,88.981 U1.G20@95.079,88.981 U1.G19@93.679,88.981 ; U1.44@95.429,93.906 U1.45@94.729,93.906 94.729,92.831 U1.G25@93.679,91.781 ; U1.7@96.129,81.956 96.129,82.879 96.5,83.25 ; U1.9@97.529,81.956 97.529,82.39 96.669,83.25 96.5,83.25 ; U1.39@98.929,93.906 98.929,92.131 U1.G34@98.579,91.781 ; U1.G14@99.979,85.481 U1.G11@99.979,84.081 U1.G10@98.579,84.081 U1.G13@98.579,85.481 U1.G16@98.579,86.881 U1.G17@99.979,86.881 U1.G18@101.379,86.881 ; U1.G32@99.979,90.381 U1.G35@99.979,91.781 ; U1.37@100.329,93.906 100.329,92.131 U1.G35@99.979,91.781 ; U1.15@101.729,81.956 U1.16@102.429,81.956 ; U1.35@101.729,93.906 101.729,93.369 v3(102.348,92.75) ; U1.17@103.554,81.956 U1.16@102.429,81.956 ; U1.19@103.554,83.731 102.771,83.731 v3(102.25,83.21) ; U1.20@103.554,84.431 101.729,84.431 U1.G12@101.379,84.081 ; U1.23@103.554,86.531 101.729,86.531 U1.G18@101.379,86.881 ; U1.24@103.554,87.231 101.729,87.231 U1.G18@101.379,86.881 ; U1.28@103.554,90.031 101.729,90.031 U1.G33@101.379,90.381 ; U1.29@103.554,90.731 102.95,90.731 102.25,91.431 ; U1.30@103.554,91.431 102.25,91.431 ; U1.33@103.554,93.906 103.504,93.906 v3@102.429,92.831 ; U1.31@103.635,92.05 U1.31@103.554,92.131 102.95,92.131 102.25,91.431 ; C1.1@109.433,101.422 C1.1@109.433,101.668 109.245,101.856 106.996,101.856 104.619,99.479 103.534,99.479 103.371,99.316 103.371,99 X1.2@102.8,99 102.8,98.195 101.021,96.416 101.021,95.584 102.429,94.176 U1.34@102.429,93.906 v3@102.429,92.831 ; v3(122.244,69.344) 123.25,68.337 J1.5@123.25,67.5 ; v3(126.1,70.5) 126.75,69.85 J1.12@126.75,67.5 ; 27.95,58.75 27.95,57.1 28,57.05 ; 92.5,89.331 93.329,89.331 U1.G19@93.679,88.981 ; v3@92.629,92.831 v3(92.666,92.794) U1.G25@93.679,91.781 ; U1.G19@93.679,88.981 U1.G22@93.679,90.381 U1.G25@93.679,91.781 ; U1.G3@96.479,84.081 96.5,84.06 96.5,83.25 ; U1.G34@98.579,91.781 U1.G35@99.979,91.781 ; U1.G34@98.579,91.781 U1.G31@98.579,90.381 U1.G28@98.579,88.981 U1.G29@99.979,88.981 U1.G30@101.379,88.981 U1.G33@101.379,90.381 ; U1.G12@101.379,84.081 U1.G15@101.379,85.481 U1.G18@101.379,86.881 ; U1.G12@101.379,84.081 v3(102.25,83.21) ; U1.G33@101.379,90.381 U1.G36@101.379,91.781 ; U1.G36@101.379,91.781 v3(102.348,92.75) ; U1.G36@101.379,91.781 101.729,91.431 102.25,91.431 ; v3(102.25,83.21) 102.429,83.031 U1.16@102.429,81.956 ; v3(102.348,92.75) v3@102.429,92.831
  other v1: 2.494,3.994 7.494,3.994 12.494,3.994 17.494,3.994 22.494,3.994 27.494,3.994 32.494,3.994 37.494,3.994 42.494,3.994 47.494,3.994 52.494,3.994 57.494,3.994 62.494,3.994 67.494,3.994 72.494,3.994 77.494,3.994 82.494,3.994 87.494,3.994 92.494,3.994 97.494,3.994 102.494,3.994 107.494,3.994 112.494,3.994 117.494,3.994 122.494,3.994 127.494,3.994 132.494,3.994 137.494,3.994 142.494,3.994 147.494,3.994 152.494,3.994 157.494,3.994 162.494,3.994 -0.006,8.994 4.994,8.994 14.994,8.994 24.994,8.994 29.994,8.994 34.994,8.994 39.994,8.994 44.994,8.994 49.994,8.994 59.994,8.994 64.994,8.994 69.994,8.994 74.994,8.994 79.994,8.994 84.994,8.994 89.994,8.994 94.994,8.994 99.994,8.994 104.994,8.994 109.994,8.994 114.994,8.994 119.994,8.994 124.994,8.994 129.994,8.994 134.994,8.994 139.994,8.994 144.994,8.994 149.994,8.994 154.994,8.994 159.994,8.994 164.994,8.994 -2.506,13.994 2.494,13.994 22.494,13.994 27.494,13.994 32.494,13.994 37.494,13.994 42.494,13.994 62.494,13.994 67.494,13.994 72.494,13.994 77.494,13.994 82.494,13.994 87.494,13.994 92.494,13.994 97.494,13.994 102.494,13.994 107.494,13.994 112.494,13.994 117.494,13.994 122.494,13.994 127.494,13.994 132.494,13.994 137.494,13.994 142.494,13.994 147.494,13.994 152.494,13.994 157.494,13.994 162.494,13.994 167.494,13.994 4.994,18.994 9.994,18.994 14.994,18.994 19.994,18.994 24.994,18.994 29.994,18.994 34.994,18.994 39.994,18.994 44.994,18.994 54.994,18.994 59.994,18.994 64.994,18.994 69.994,18.994 74.994,18.994 79.994,18.994 84.994,18.994 89.994,18.994 94.994,18.994 99.994,18.994 104.994,18.994 109.994,18.994 114.994,18.994 119.994,18.994 124.994,18.994 129.994,18.994 134.994,18.994 139.994,18.994 144.994,18.994 149.994,18.994 154.994,18.994 159.994,18.994 164.994,18.994 169.994,18.994 -2.506,23.994 2.494,23.994 7.494,23.994 12.494,23.994 17.494,23.994 22.494,23.994 27.494,23.994 32.494,23.994 37.494,23.994 42.494,23.994 47.494,23.994 52.494,23.994 57.494,23.994 62.494,23.994 67.494,23.994 72.494,23.994 77.494,23.994 82.494,23.994 87.494,23.994 92.494,23.994 97.494,23.994 102.494,23.994 107.494,23.994 112.494,23.994 117.494,23.994 122.494,23.994 127.494,23.994 132.494,23.994 137.494,23.994 142.494,23.994 147.494,23.994 152.494,23.994 157.494,23.994 162.494,23.994 167.494,23.994 4.994,28.994 9.994,28.994 14.994,28.994 19.994,28.994 24.994,28.994 29.994,28.994 34.994,28.994 39.994,28.994 44.994,28.994 49.994,28.994 54.994,28.994 59.994,28.994 64.994,28.994 69.994,28.994 74.994,28.994 79.994,28.994 84.994,28.994 89.994,28.994 94.994,28.994 99.994,28.994 104.994,28.994 109.994,28.994 114.994,28.994 119.994,28.994 124.994,28.994 129.994,28.994 134.994,28.994 139.994,28.994 144.994,28.994 149.994,28.994 154.994,28.994 159.994,28.994 164.994,28.994 169.994,28.994 -2.506,33.994 7.494,33.994 12.494,33.994 17.494,33.994 22.494,33.994 27.494,33.994 32.494,33.994 37.494,33.994 42.494,33.994 47.494,33.994 52.494,33.994 57.494,33.994 62.494,33.994 67.494,33.994 72.494,33.994 82.494,33.994 87.494,33.994 92.494,33.994 97.494,33.994 102.494,33.994 107.494,33.994 112.494,33.994 117.494,33.994 122.494,33.994 127.494,33.994 132.494,33.994 137.494,33.994 142.494,33.994 147.494,33.994 152.494,33.994 157.494,33.994 162.494,33.994 167.494,33.994 159.065,34.348 161.155,34.844 159.089,35.852 161.155,36.348 137.338,37.767 138.842,37.767 140.346,37.767 141.85,37.767 143.354,37.767 144.858,37.767 146.362,37.767 147.866,37.767 149.37,37.767 150.874,37.767 152.378,37.767 153.882,37.767 155.386,37.767 156.89,37.767 158.394,37.767 163.99,37.767 165.494,37.767 135.835,37.809 161.155,37.852 134.336,37.929 132.845,38.125 131.366,38.399 129.903,38.748 19.994,38.994 24.994,38.994 29.994,38.994 34.994,38.994 39.994,38.994 44.994,38.994 49.994,38.994 64.994,38.994 69.994,38.994 74.994,38.994 84.994,38.994 89.994,38.994 94.994,38.994 99.994,38.994 104.994,38.994 109.994,38.994 114.994,38.994 119.994,38.994 124.994,38.994 128.46,39.172 127.041,39.67 137.733,39.833 139.237,39.833 140.741,39.833 142.245,39.833 143.749,39.833 145.253,39.833 146.757,39.833 148.261,39.833 149.765,39.833 151.269,39.833 152.773,39.833 154.277,39.833 155.781,39.833 157.285,39.833 158.789,39.833 160.293,39.834 161.999,39.833 163.503,39.833 165.007,39.833 136.229,39.855 134.729,39.96 133.237,40.148 125.649,40.241 131.758,40.419 130.295,40.771 124.289,40.883 128.855,41.204 122.964,41.594 127.441,41.717 126.058,42.307 121.677,42.372 124.709,42.972 120.432,43.216 123.399,43.712 -2.506,43.994 22.494,43.994 27.494,43.994 32.494,43.994 37.494,43.994 42.494,43.994 62.494,43.994 67.494,43.994 72.494,43.994 77.494,43.994 82.494,43.994 92.494,43.994 97.494,43.994 102.494,43.994 107.494,43.994 112.494,43.994 127.494,43.994 132.494,43.994 137.494,43.994 142.494,43.994 147.494,43.994 152.494,43.994 157.494,43.994 162.494,43.994 119.232,44.123 122.136,44.529 118.083,45.093 120.921,45.415 116.988,46.124 119.757,46.367 115.947,47.21 118.648,47.383 114.963,48.347 117.596,48.458 84.994,48.994 94.994,48.994 99.994,48.994 104.994,48.994 109.994,48.994 119.994,48.994 124.994,48.994 129.994,48.994 134.994,48.994 139.994,48.994 144.994,48.994 149.994,48.994 154.994,48.994 159.994,48.994 164.994,48.994 169.994,48.994 114.04,49.535 116.606,49.59 113.179,50.768 115.681,50.776 114.822,52.011 112.383,52.044 114.034,53.291 111.653,53.359 -2.506,53.994 92.494,53.994 97.494,53.994 102.494,53.994 107.494,53.994 117.494,53.994 122.494,53.994 127.494,53.994 132.494,53.994 137.494,53.994 142.494,53.994 147.494,53.994 152.494,53.994 157.494,53.994 162.494,53.994 167.494,53.994 113.317,54.614 110.993,54.71 112.676,55.974 110.403,56.094 112.11,57.368 109.885,57.506 111.624,58.791 109.441,58.943 94.994,58.994 99.994,58.994 104.994,58.994 114.994,58.994 119.994,58.994 124.994,58.994 129.994,58.994 134.994,58.994 139.994,58.994 144.994,58.994 149.994,58.994 154.994,58.994 164.994,58.994 169.994,58.994 111.22,60.24 109.071,60.401 110.901,61.709 108.78,61.876 110.664,63.195 108.567,63.365 -2.506,63.994 32.494,63.994 87.494,63.994 92.494,63.994 97.494,63.994 102.494,63.994 112.494,63.994 122.494,63.994 127.494,63.994 132.494,63.994 137.494,63.994 147.494,63.994 152.494,63.994 167.494,63.994 110.509,64.691 108.434,64.863 110.438,66.193 108.377,66.366 110.433,67.697 108.367,67.87 14.994,68.994 19.994,68.994 69.994,68.994 74.994,68.994 79.994,68.994 89.994,68.994 94.994,68.994 99.994,68.994 104.994,68.994 114.994,68.994 119.994,68.994 169.994,68.994 110.433,69.201 108.367,69.374 110.433,70.705 108.367,70.878 110.433,72.209 108.367,72.382 110.433,73.713 108.367,73.886 -2.506,73.994 2.494,73.994 17.494,73.994 22.494,73.994 72.494,73.994 102.494,73.994 112.494,73.994 152.494,73.994 157.494,73.994 162.494,73.994 167.494,73.994 110.433,75.217 108.367,75.39 110.433,76.721 108.367,76.894 110.433,78.225 108.367,78.398 29.994,78.994 39.994,78.994 89.994,78.994 154.994,78.994 159.994,78.994 164.994,78.994 169.994,78.994 110.433,79.729 108.367,79.902 110.345,81.23 108.08,81.378 105.205,81.998 106.709,81.998 109.731,82.603 108.604,83.599 -2.506,83.994 2.494,83.994 17.494,83.994 22.494,83.994 27.494,83.994 32.494,83.994 42.494,83.994 87.494,83.994 112.494,83.994 117.494,83.994 122.494,83.994 127.494,83.994 132.494,83.994 137.494,83.994 142.494,83.994 147.494,83.994 152.494,83.994 157.494,83.994 162.494,83.994 167.494,83.994 107.166,84.04 105.662,84.064 19.994,88.994 24.994,88.994 29.994,88.994 34.994,88.994 39.994,88.994 64.994,88.994 109.994,88.994 114.994,88.994 119.994,88.994 124.994,88.994 129.994,88.994 134.994,88.994 139.994,88.994 144.994,88.994 149.994,88.994 154.994,88.994 159.994,88.994 164.994,88.994 169.994,88.994 104.801,91.726 106.305,91.726 107.809,91.726 109.313,91.726 110.817,91.726 112.321,91.726 113.825,91.726 115.329,91.726 116.833,91.726 118.337,91.726 119.841,91.726 121.345,91.726 122.849,91.726 124.353,91.726 125.857,91.726 127.361,91.733 130.129,91.726 131.633,91.726 133.137,91.726 134.641,91.726 136.145,91.726 137.649,91.726 139.153,91.726 140.657,91.726 142.161,91.726 143.665,91.726 145.169,91.726 146.673,91.726 148.177,91.726 149.68,91.761 151.091,92.282 152.178,93.322 104.869,93.936 106.373,93.936 107.877,93.936 109.381,93.936 110.885,93.936 112.389,93.936 113.893,93.936 115.397,93.936 116.901,93.936 118.405,93.936 119.909,93.936 121.413,93.936 122.917,93.936 124.421,93.936 128.503,93.936 130.007,93.936 131.511,93.936 133.015,93.936 134.519,93.936 136.023,93.936 137.527,93.936 139.031,93.936 140.535,93.936 142.039,93.936 143.543,93.936 145.047,93.936 146.551,93.936 148.055,93.936 7.494,93.994 12.494,93.994 17.494,93.994 22.494,93.994 37.494,93.994 42.494,93.994 52.494,93.994 157.494,93.994 162.494,93.994 149.558,94 152.75,94.713 126.199,94.892 150.571,95.112 152.808,96.216 128.41,96.331 126.199,96.396 150.598,96.616 152.808,97.72 128.41,97.835 126.199,97.9 150.598,98.12 4.994,98.994 9.994,98.994 14.994,98.994 19.994,98.994 24.994,98.994 29.994,98.994 114.994,98.994 119.994,98.994 124.994,98.994 129.994,98.994 134.994,98.994 139.994,98.994 144.994,98.994 154.994,98.994 159.994,98.994 152.808,99.224 150.598,99.624 152.808,100.728 150.598,101.128 152.808,102.232 150.598,102.632 152.845,103.736 2.494,103.994 7.494,103.994 12.494,103.994 17.494,103.994 22.494,103.994 27.494,103.994 32.494,103.994 37.494,103.994 42.494,103.994 47.494,103.994 52.494,103.994 57.494,103.994 62.494,103.994 67.494,103.994 72.494,103.994 77.494,103.994 82.494,103.994 87.494,103.994 92.494,103.994 97.494,103.994 102.494,103.994 107.494,103.994 112.494,103.994 117.494,103.994 122.494,103.994 127.494,103.994 132.494,103.994 137.494,103.994 142.494,103.994 147.494,103.994 157.494,103.994 162.494,103.994
  other v3: 33.15,72.85
GPIO1_0: P3.25 R35.1 | length 58.7
  Component Side w0.254: P3.25@54.26,65.98 54.83,65.98 56.31,64.5 56.31,60.397 55.771,59.859 51.503,59.859 47.836,63.526 47.836,68.379 48.45,68.993 48.45,71.303 49.655,72.508 55.72,72.508 56.825,73.612 56.825,74.087 57.593,74.856 60.733,74.856 63,77.122 63,87.532 63.548,88.079 65.875,88.079 66.65,88.079 67.306,87.423 67.306,86.444 R35.1@67.5,86.25
GPIO1_1: P3.24 R36.1 | length 25.6
  Component Side w0.254: P3.24@59.465,63.44 62.322,63.44 65.25,66.368 65.25,69.055 68.129,71.934 68.129,82.816 67.5,83.445 R36.1@67.5,83.5
GPIO1_2: P3.5 R37.1 | length 58.9
  Component Side w0.254: v2(48,45.66) 48,44.58 52,40.58 P3.5@54.26,40.58 ; v2(48.75,68) 48.856,68.106 48.856,70.376 50.581,72.101 56.207,72.101 57.231,73.126 57.231,73.919 57.762,74.449 61.04,74.449 62.656,76.065 62.656,76.138 65.628,79.11 65.628,80.253 R37.1@67.5,82.125 R37.1@67.5,82.25
  Solder Side w0.254: v2(48,45.66) 48,63.95 48.75,64.7 v2(48.75,68)
GPIO1_3: P3.6 R38.1 | length 65.1
  Component Side w0.254: v2(48,42.079) 48.821,42.079 51.361,39.539 56.289,39.539 57.33,40.58 P3.6@59.465,40.58 ; v2(50.8,69.344) 51.456,70 56.31,70 56.31,70.051 57.259,71 57.259,71.406 58.098,72.245 61.882,72.245 63.062,73.425 63.062,75.97 66.464,79.372 66.464,79.909 67.305,80.75 R38.1@67.5,80.75
  Solder Side w0.254: v2(48,42.079) 48,43.619 49,44.619 49.434,44.619 49.434,66.834 50.8,68.2 v2(50.8,69.344)